# Altium PCB PCB1.PcbDoc
Units mm, origin at the board's own origin, x right, y up, seen from the top; angles counter-clockwise.
Board outline 70.48 x 50.8 mm, 2 copper layers (Top Layer, Bottom Layer); 12 components, 9 nets, 38 pads, 0 vias.
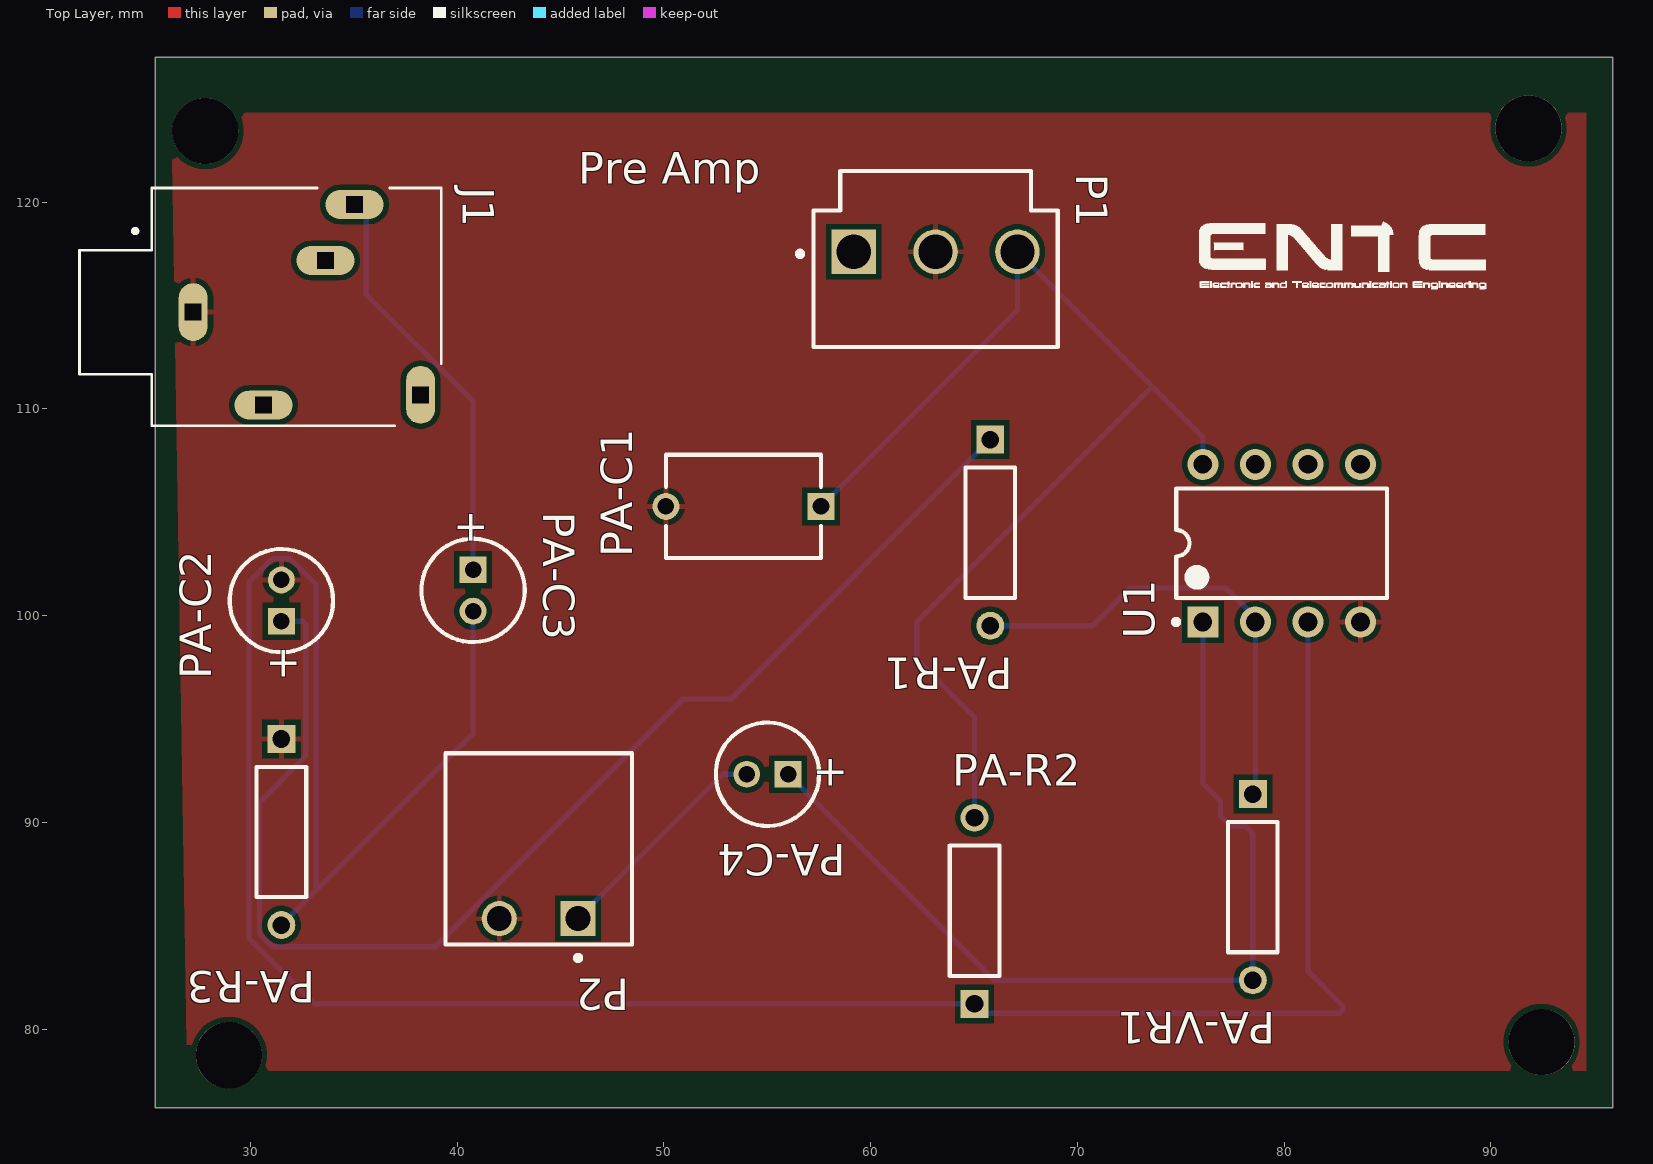
[diagram p0: Top Layer view]
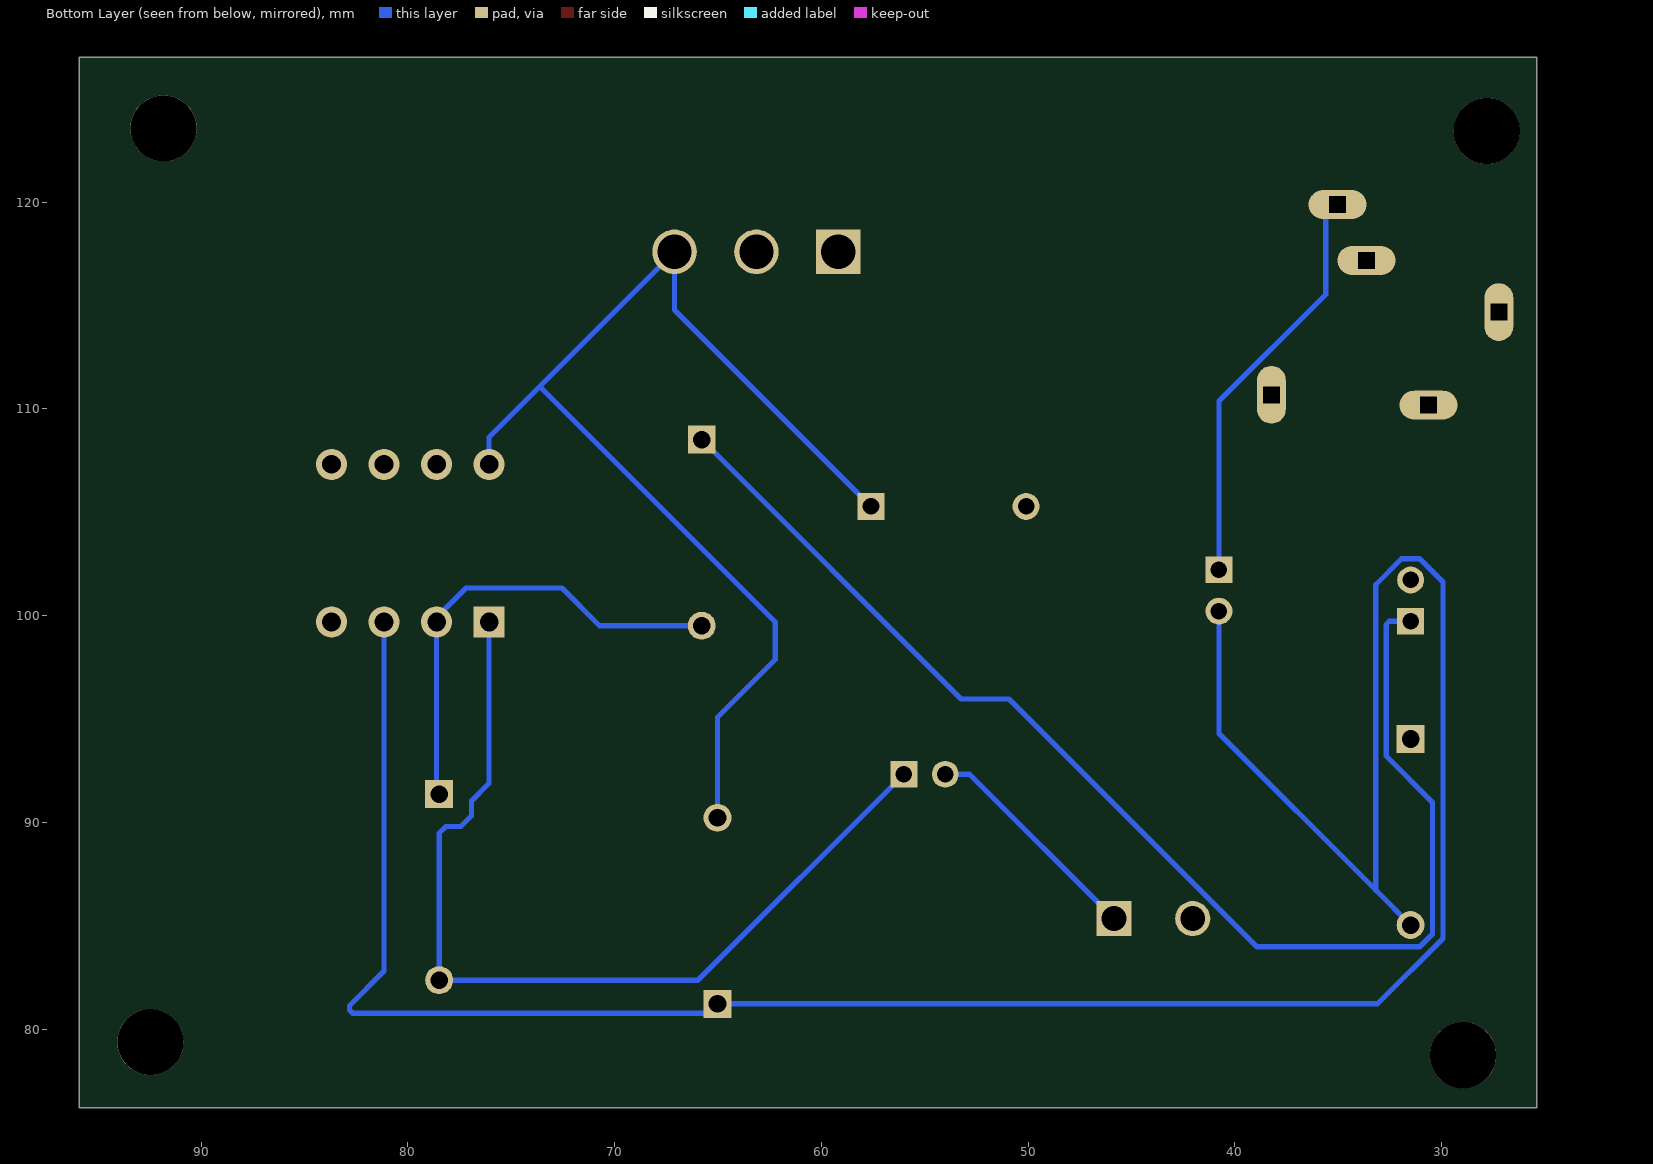
[diagram p1: Bottom Layer view, seen from below]

## Layer stack, top to bottom
Top Solder: solder mask 0.0102, Solder Resist, Dk 3.5
Top Layer: signal copper 0.0356
Dielectric 1: dielectric 0.32, FR-4, Dk 4.8
Bottom Layer: signal copper 0.0356
Bottom Solder: solder mask 0.0102, Solder Resist, Dk 3.5

## Board outline
25.4,76.2 95.885,76.2 95.885,127 25.4,127

## Design rules (kind name [scope] priority, off if disabled: settings)
Clearance [All] p1: gap=0.254 ignorepadtopadclearanceinfootprint=FALSE
HoleSize [All] p1: absolutevalues=TRUE maxlimit=4 minlimit=0.025 maxpercent=80.000 minpercent=20.000
PolygonConnect [All] p1: connectstyle=Relief reliefconductorwidth=0.254 reliefentries=4 polygonreliefangle="90 Angle" airgapwidth=0.254
RoutingVias [All] p1: holewidth=0.711 width=1.27 viastyle="Through Hole" minholewidth=0.711 minwidth=1.27 maxholewidth=0.711 maxwidth=1.27
SilkToSilkClearance [All] p1: silktosilkclearance=0.1
SilkToSolderMaskClearance [IsPad] p1: minsilkscreentomaskgap=0.1 clearancetoexposedcopper=TRUE
SolderMaskExpansion [All] p1: expansion=0.102 istentingtop=FALSE
SupplyNets "Schematic Supply Nets_2" [InNet('GND')] p1: voltage=0.000
SupplyNets "Schematic Supply Nets_1" [InNet('-12')] p2: voltage=0.000
SupplyNets "Schematic Supply Nets" [InNet('+12')] p3: voltage=0.000
Width [All] p1: maxlimit=0.254 minlimit=0.254 preferedwidth=0.254
27 further rules are at their usual default settings.

## Classes and differential pairs
component class Sheet1: J1 P1 P2 PA-C1 PA-C2 PA-C3 PA-C4 PA-R1 PA-R2 PA-VR1 U1

## Components (designator, comment, footprint, x,y, rotation, side; value= is the part's Value field where it differs from the comment)
J1 "35RAPC4BH3" SWITCHCRAFT_35RAPC4BH3 30.48,114.935 r0 top
P1 "B3P-VH(LF)(SN)" JST-B3P-VH(LF)(SN)-3_V 63.142,116.352 r0 top
P2 "1803277" PHOE-1803277_V 43.942,85.344 r180 top
PA-C1 "100n" FP-VY2102M29Y5US6TV7-MFG 53.848,105.283 r180 top
PA-C2 "ECA1HM100" CAPPR55-200-1100X500X1200 31.496,100.727 r90 top value=10µF
PA-C3 "ECA-1HHG010" CAPPR55-200-1100X500X1200 40.767,101.219 r270 top value=1µF
PA-C4 "ECA1HM100" CAPPR55-200-1100X500X1200 55.007,92.329 r180 top value=10µF
PA-R1 "MFR-25FBF52-2K21" RESA60-630X240 65.786,104.013 r270 top
PA-R2 "100k" RESA60-630X240 65.024,85.725 r90 top
PA-R3 "100k" RESA60-630X240 31.496,89.535 r270 top
PA-VR1 "MFR-25FBF52-2K21" RESA60-630X240 78.486,86.868 r270 top
U1 "NE5532P" P0008A 79.883,103.505 r90 top

## Footprints (in the part's own frame and the unit in brackets; to place one, negate y for a bottom-side part, rotate by r counter-clockwise, add the part's x,y. Pads: shape width x height; smd on the part's side, far side on the other; paste and mask are expansions set on the pad)
CAPPR55-200-1100X500X1200 [mm] "THD, 2-Leads, Dia 5mm, Pin Spacing 2mm"
  rect 1.3x1.3 hole 0.8: 1(-1,0)
  round 1.3 hole 0.8: 2(1,0)
  silkscreen extent -2.5,-2.5 2.5,2.5, body extent -2.5,-2.5 2.45,2.5, height 12
FP-VY2102M29Y5US6TV7-MFG [mm]
  rect 1.3x1.3 hole 0.8 paste-2539.97 mask+0: 1(-3.75,0)
  round 1.3 hole 0.8 paste-2539.97 mask+0: 2(3.75,0)
  silkscreen extent -3.75,-2.5 3.75,2.5, body extent -4.5,-2.6 4.5,2.6, height 0.25
JST-B3P-VH(LF)(SN)-3_V [mm] "Connector, 3-Leads, Body 8.5x11.82mm, Pitch 3.96mm"
  rect 2.15x2.15 hole 1.65: 1(-3.96,1.25)
  round 2.15 hole 1.65: 2(0,1.25) 3(3.96,1.25)
  silkscreen extent -6.68,-3.35 5.91,5.15, body extent -5.91,-3.35 5.91,5.15, height 10.9
P0008A [mm] "DIP, 8-Leads, Body 10.15x6.6mm, Pitch 2.54mm"
  rect 1.5x1.5 hole 0.9: 1(-3.81,3.81)
  round 1.5 hole 0.9: 2(-3.81,1.27) 3(-3.81,-1.27) 4(-3.81,-3.81) 5(3.81,-3.81) 6(3.81,-1.27) 7(3.81,1.27) 8(3.81,3.81)
  silkscreen extent -3.93,-5.1 2.65,5.23, body extent -3.95,-5.07 3.95,5.07, height 5.08
PHOE-1803277_V [mm] "CONN, Body 9.2x9.01mm, Pitch 3.81mm"
  rect 1.7x1.7 hole 1.2: 1(-1.905,0)
  round 1.7 hole 1.2: 2(1.905,0)
  silkscreen extent -4.5,-8 4.5,2.02, body extent -4.51,-8 4.5,1.3, height 7.25
RESA60-630X240 [mm] "Axial Resistor, 2-Leads, Dia 2.4mm, Body Length 6.3mm"
  rect 1.35x1.35 hole 0.85: 1(-4.5,0)
  round 1.35 hole 0.85: 2(4.5,0)
  silkscreen extent -3.15,-1.2 3.15,1.2, body extent -3.15,-1.2 3.15,1.2, height 2.4
SWITCHCRAFT_35RAPC4BH3 [mm]
  oval 1.4x2.8 hole 0.8 square: 1(-3.25,-0.25) 4(7.75,-4.25)
  oval 2.8x1.4 hole 0.8 square: 2(4.55,4.95) 3(3.15,2.25) 5(0.15,-4.75)
  silkscreen extent -8.75,-5.75 8.75,5.75, body extent -8.62,-5.71 8.88,5.78, height 5.5

## Part data
J1: "PC horizontal mount Jack stereo threaded bushing 3.5MM, 35 Series", Package=None, Check_prices=https://www.snapeda.com/parts/35RAPC4BH3/SWITCHCRAFT/view-part/?ref=eda, MF="Switchcraft Inc.", MP=35RAPC4BH3, SnapEDA_Link=https://www.snapeda.com/parts/35RAPC4BH3/SWITCHCRAFT/view-part/?ref=snap
P1: library part CMP-002-00026-2, "Male Header, Pitch 3.96 mm, 1 x 3 Position, Height 10.9 mm, Tail Length 3.7 mm, -25 to 85 degC, RoHS, Bulk", Manufacturer=JST, Max Operating Temperature=85°C, Min Operating Temperature=-25°C, Package Description="Male Header, Pitch 3.96 mm, 1 x 3 Position, Height 10.9 mm, Tail Length 3.7 mm", Case/Package=B3P-VH(LF)(SN), Connector Type=Header, Datasheet URL=http://www.jst-mfg.com/product/pdf/eng/eVH.pdf, Datasheet Version=May-16, Gender=Male, Manufacturer URL=http://www.jst.com/home2.html, Mounting Technology=TH, Package Reference=B3P-VH(LF)(SN), RoHS Compliant=Unknown
P2: library part CMP-002-00014-2, "Male Header, Pitch 3.81 mm, 1 x 2 Position, Height 7.25 mm, Tail Length 3.4 mm, RoHS, Bulk", Colour=Green, Current Rating=8A, Manufacturer="Phoenix Contact", Package Description="Male Header, Pitch 3.81 mm, 1 x 2 Position, Height 7.25 mm, Tail Length 3.4 mm", Package Quantity=50, Voltage Rating=160V, Case/Package=1803277, Connector Type=Header, Contact Plating=Tin, Datasheet URL=https://datasheet.ciiva.com/16096/1803277-16096845.pdf, Datasheet Version=Feb-14, Diameter=7.25mm, Gender=Male, Lead Pitch=0.15inch, Manufacturer URL=http://www.phoenixcontact.com/, Max Current Rating=8A, Mounting Technology=TH, Package Reference=1803277, Packaging=Bulk, Pins=2, RoHS Compliant=True, Rows=1
PA-C1: library part CMP-00030-42817980-1, "VY2102M29Y5US6TV7 Cap Ceramic Suppression X1/Y2 0.001uF 440VAC/300VAC Y5U 20% (7.5 X 5mm) Radial 7.5mm 125C T/R", Capacitance=1nF, Case/Package=Radial, Dielectric=Y5U, Max Operating Temperature=125°C, Min Operating Temperature=-40°C, Tolerance=20%, Voltage=300V, Voltage Rating=1kV, Composition=Ceramic, Depth=5mm, Diameter=7.5mm, Height=10.5mm, Height - Seated (Max)=11.5062mm, Lead Diameter=600µm, Lead Free="Lead Free", Lead Pitch=7.5mm, Lead/Base Style=Kinked, Material=Ceramic, Mount="Through Hole", NexarPartId=42817980, Packaging="Tape & Reel (TR)", Radiation Hardening=No, REACH SVHC=Unknown, RoHS=Compliant, Schedule B="8532230060, 8532230060", Termination=Radial, Voltage Rating (AC)=300V
PA-C2 PA-C4: library part CMP-001-00025-7, "Aluminum Electrolytic Capacitor, 10 uF, +/- 20%, 50 V, -40 to 85 degC, 2-Pin THD, RoHS, Bulk", Capacitor Type=Electrolytic, Case/Package=Radial, Manufacturer=Panasonic, Max Operating Temperature=85°C, Min Operating Temperature=-40°C, Package Description="2-Pin Radial Lead, Dia 5 mm, Height 12 mm", Package Quantity=200, Package Reference=CAPPR55-200-1100X500X1200, Ripple Current=65mA, Tolerance=20%, Voltage Rating=50V, Datasheet URL=https://industrial.panasonic.com/cdbs/www-data/pdf/RDF0000/ABA0000C1218.pdf, Datasheet Version="Rev. 05, 10/2016", Diameter=5mm, Lead Pitch=2mm, Manufacturer URL=http://www.panasonic.com/, Mounting Technology=TH, Packaging=Bulk, Pins=2, Ripple Current (AC)=65mA, RoHS Compliant=True
PA-C3: library part CMP-001-00024-7, "Aluminum Electrolytic Capacitor, 1 uF, +/- 20%, 50 V, -55 to 105 degC, 2-Pin THD, RoHS, Bulk", Capacitor Type=Electrolytic, Case/Package=Radial, Manufacturer=Panasonic, Max Operating Temperature=105°C, Min Operating Temperature=-55°C, Package Description="2-Pin Radial Lead, Dia 5 mm, Height 12 mm", Package Quantity=200, Package Reference=CAPPR55-200-1100X500X1200, Ripple Current=10mA, Tolerance=20%, Voltage Rating=50V, Datasheet URL=https://datasheet.ciiva.com/7275/94060-7275472.pdf, Datasheet Version=Mar-05, Diameter=5mm, Lead Pitch=2mm, Manufacturer URL=http://www.panasonic.com/, Mounting Technology=TH, Packaging=Bulk, Pins=2, Ripple Current (AC)=10mA, RoHS Compliant=True
PA-R1 PA-VR1: library part CMP-1659-00065-1, "Axial Resistor, 2.21 KOhm, +/- 1%, 0.25 W, -55 to 155 degC, 2-Pin THD, RoHS, Bulk", Case Code (Imperial)=0402, Case Code (Metric)=1005, Current Rating="300 mA", Max Operating Temperature="125 degC", Min Operating Temperature="-55 degC", Package Quantity=10000, Resistance="0.15 Ohm", Case\Package=0402, ComponentLink1Description="Manufacturer URL", ComponentLink1URL=http://www.yageo.com/, ComponentLink2Description=Datasheet, ComponentLink2URL=http://www.yageo.com/documents/recent/Yageo%20LR_MFR_2013.pdf, DatasheetVersion=Apr-13, Height="0.02 inch", Length="0.04 inch", Mount="Surface Mount", PackageDescription="2-Pin Axial Lead, Dia 2.4 mm, Body Length 6.3 mm", PackageReference=MFR-25, Packaging="Tape and Reel", Pins=2, Radiation Hardening=No, REACH SVHC="No SVHC", RoHSCompliant=true, Shielding=Unshielded, Width="0.02 inch"
PA-R2 PA-R3: library part CMP-1659-00073-1, "Axial Resistor, 100 KOhm, +/- 1%, 0.25 W, -55 to 155 degC, 2-Pin THD, RoHS, Bulk", Case\Package=Axial, Max Operating Temperature="155 degC", Min Operating Temperature="-55 degC", Package Quantity=200, Power Rating="250 mW", Resistance="475 Ohm", Tolerance=1%, Voltage Rating="250 V", ComponentLink1Description="Manufacturer URL", ComponentLink1URL=http://www.yageo.com/, ComponentLink2Description=Datasheet, ComponentLink2URL=http://www.yageo.com/documents/recent/Yageo%20LR_MFR_2013.pdf, DatasheetVersion=Apr-13, Length="0.248 inch", Mount="Through Hole", PackageDescription="2-Pin Axial Lead, Dia 2.4 mm, Body Length 6.3 mm", PackageReference=MFR-25, Packaging=Bulk, RoHSCompliant=true
U1: library part CMP-0017-00910-2, "Dual Low-Noise High-Speed Audio Operational Amplifier, 10 to 30 V, 0 to 70 degC, 8-pin DIP (P8), Pb-Free (RoHS)", Manufacturer="Texas Instruments", Total Supply Voltage(Max)(+5V is 5, +/-5V is 10)=30, Total Supply Voltage(Min)(+5V is 5, +/-5V is 10)=10, CMRR(Min)(dB)=70, Code_JEDEC=MS-001, ComponentLink1Description="Manufacturer URL", ComponentLink1URL=http://www.ti.com/, ComponentLink2Description=Datasheet, ComponentLink2URL=http://www.ti.com/lit/ds/symlink/ne5532.pdf, ComponentLink3Description="Package Specification", ComponentLink3URL=http://www.ti.com/litv/pdf/mpdi001b, DatasheetVersion=SLOS075I, Eco-Plan="Pb-Free (RoHS)", GBW(Typ)(MHz)=10, IIB(Max)(pA)=800000, Iq per channel(Max)(mA)=4, Mounting Technology="Through Hole", Number of Channels=2, PackageDescription="8-Pin Plastic In-Line, Body 9.59 x 6.35 mm, Pitch 2.54 mm", PackageReference=P0008A, PackageVersion="4040082/E, 04/2010", PartNumber=NE5532P, Slew Rate(Typ)(V/us)=9, Sub Family="General Purpose Amplifier, High Supply Voltage Amplifier (>=30V), Low Noise Amp (<=10nV/rtHz)", Vio (25C)(Max)(mV)=4, Vn at 1kHz(Typ)(nV/rtHz)=5

## Free pads (board coordinates)
  round 3.2 hole 3.2 unplated: 13(91.821,123.571) 14(92.456,79.375) 15(28.956,78.74) 16(27.813,123.444)

## Nets (pads, with @x,y where several pads share a name; then routed paths per layer and width w, separated by ;. In a path a pad name is that pad's centre, name@x,y a point inside that pad or via, vN(x,y) a via of type N, cw(c..) or ccw(c..) an arc to the next point about the centre after c; other vN are vias at no path point)
+12: P1.3 PA-C1.1 PA-R2.2 U1.8 | length 57
  Bottom Layer w0.254: PA-C1.1 67.102,114.787 P1.3 73.619,111.084 ; PA-R2.2 65.024,95.089 62.23,97.883 62.23,99.695 73.619,111.084 ; U1.8 76.073,108.631 73.619,111.084
-12: P1.1
GND: J1.1 P1.2 P2.2 PA-C1.2 PA-C2.2 PA-R3.1 U1.4
NetJ1_2: J1.2 PA-C3.1 | length 20.1
  Bottom Layer w0.254: J1.2 35.074,119.885 35.603,119.356 35.603,115.541 40.767,110.377 PA-C3.1
NetP2_1: P2.1 PA-C4.2 | length 11.1
  Bottom Layer w0.254: P2.1 52.832,92.329 PA-C4.2
NetPA-C2_1: PA-C2.1 PA-R1.1 | length 62.9
  Bottom Layer w0.254: PA-C2.1 32.527,99.727 32.676,99.578 32.676,93.206 30.44,90.97 30.44,84.598 31.059,83.979 38.931,83.979 50.924,95.972 53.245,95.972 PA-R1.1
NetPA-C3_2: PA-C3.2 PA-R2.1 PA-R3.2 U1.3 | length 129.2
  Bottom Layer w0.254: PA-R3.2 33.184,86.723 ; PA-C3.2 40.767,94.306 33.184,86.723 ; U1.3 81.153,82.804 82.826,81.131 82.826,80.921 82.677,80.772 65.477,80.772 PA-R2.1 33.094,81.225 29.932,84.387 29.932,101.621 31.069,102.758 31.923,102.758 33.184,101.497 33.184,86.723
NetPA-C4_1: PA-C4.1 PA-VR1.2 U1.1 | length 45.4
  Bottom Layer w0.254: PA-C4.1 65.968,82.368 PA-VR1.2 78.486,89.479 78.161,89.804 77.443,89.804 76.922,90.325 76.922,91.043 76.073,91.892 U1.1
NetPA-R1_2: PA-R1.2 PA-VR1.1 U1.2 | length 22.8
  Bottom Layer w0.254: PA-R1.2 70.726,99.513 72.547,101.334 77.191,101.334 78.613,99.912 U1.2 78.613,91.495 PA-VR1.1
pads on no net: J1.3 J1.4 J1.5 U1.5 U1.6 U1.7

## Polygon pours and split planes (outlines as drawn)
GND on Top Layer "GND_L01_P001" (solid, pour order 1): 26.174,124.333 94.615,124.333 94.615,77.978 27.559,77.978 27.051,77.47 26.924,77.597 26.924,78.232

## Silkscreen, mask and mechanical layers (free items; w line width, h text height)
Top Overlay:
  drawing of 51 lines, arcs and shapes, not listed
  text "Pre Amp" at 45.847,120.904 h1.52

## Text inside footprints (layer, text, board x,y; h text height)
PA-C2: Top Overlay "+" at 32.233,96.819 h1.5 r90
PA-C3: Top Overlay "+" at 40.03,105.127 h1.5 r270
PA-C4: Top Overlay "+" at 58.915,93.066 h1.5 r180